# EAGLE board Companion bot (EAGLE 9.7.0)
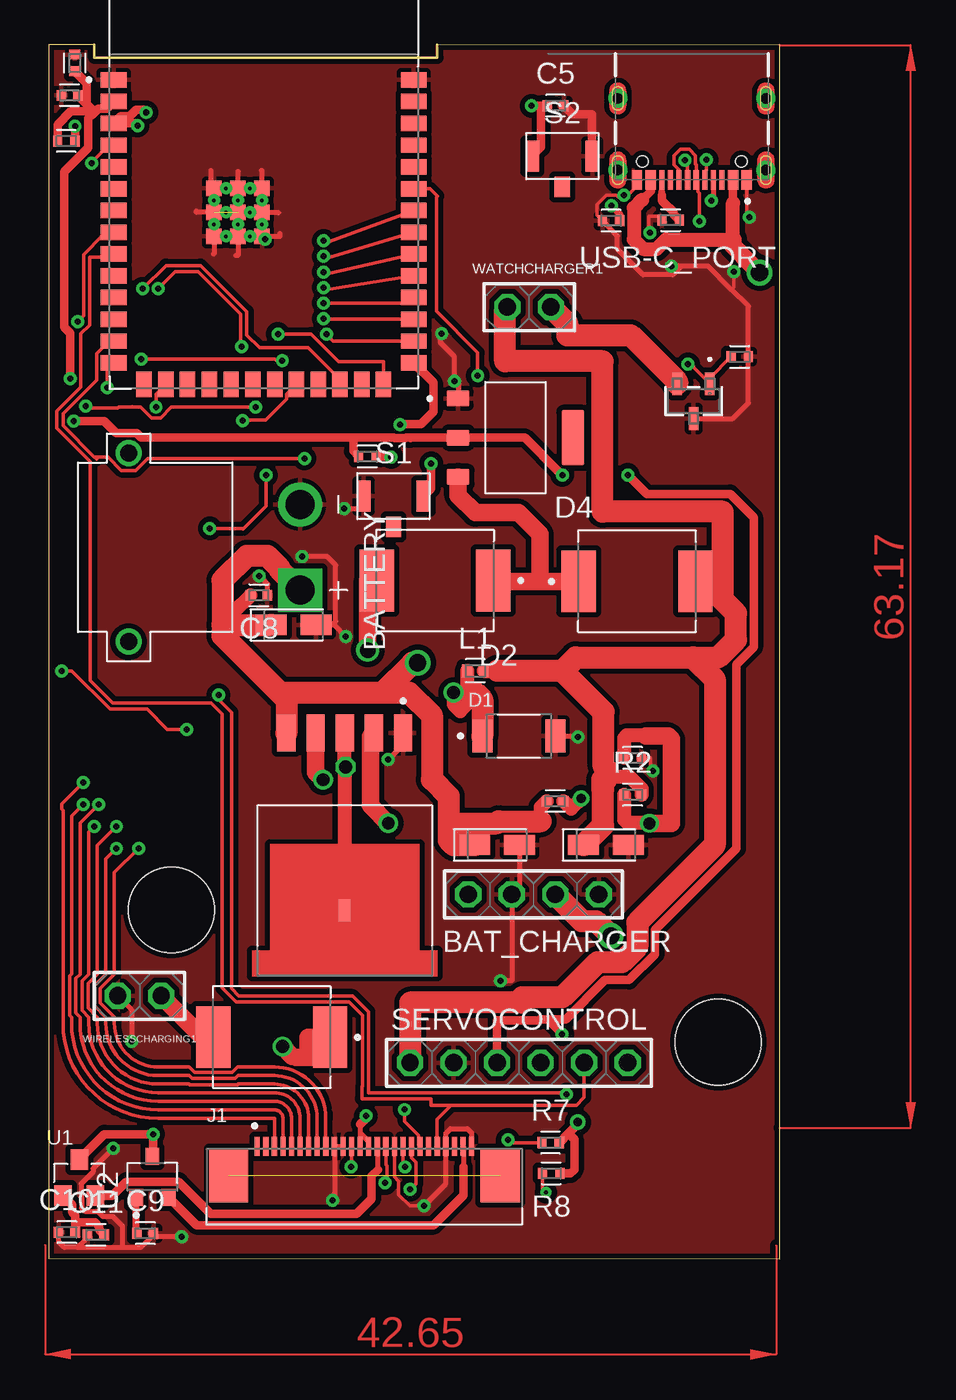
[diagram p0: board, top side]
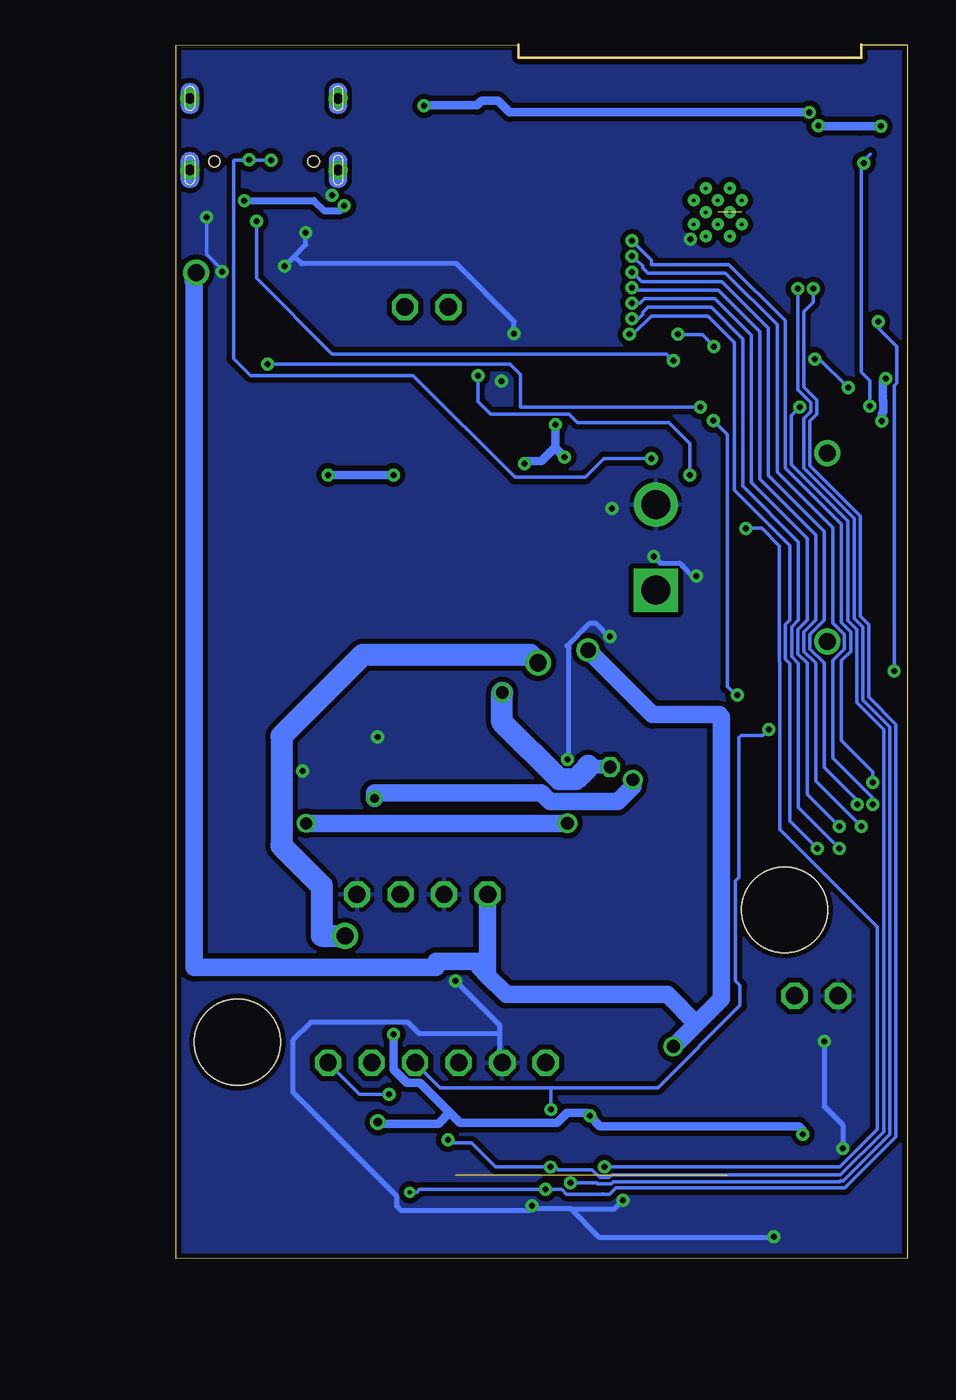
[diagram p1: board, bottom side, seen from below]

Size 42.65 x 70.82 mm. Coordinates in mm from the lower left corner, seen from the top.
Outline: 0,70.82 0,0.02 42.65,0 42.65,70.8 22.66,70.81 22.66,70.07 2.67,70.07 2.67,70.82 0,70.82
Copper layers (1*16): Top 0.035mm / dielectric 1.5mm / Bottom 0.035mm
Design rules "Fusion Electronics Design Rules": minimum track width 6mil, minimum drill 0.35mm, track to track 6mil, track to pad 6mil, pad to pad 6mil, via to via 6mil, smd to smd 6mil, copper to edge 6mil, drill to drill 6mil, minimum pad ring 10mil, minimum via ring 8mil, stop-mask expansion 4mil, vias tented up to drill 9999mil, thermal gap 10mil
Holes 5 mm at 39.07,12.64 7.16,20.35

## Footprints (pad centres in the part's own frame; a part is rotated, then mirrored left to right if it is on the bottom)
SOT229P700X180-4N = smd 1.31 x 0.93: 1 -3.345,2.29; 2 -3.345,0; 3 -3.345,-2.29 | smd 1.31 x 3.24: 4 3.345,0
CONV_XL4015 = smd 2.16 x 1.07: 1 -10.335,3.4; 2 -10.335,1.7; 3 -10.335,0; 4 -10.335,-1.7; 5 -10.335,-3.4 | smd 1.27 x 0.635: 3.1 0,0
1X04 = drill 1.016 octagon: 1 -3.81,0; 2 -1.27,0; 3 1.27,0; 4 3.81,0
AMASS_XT30PW-M = drill 1.7: N 2.5,-10 | drill 1.7 square: P -2.5,-10 | drill 1: S1 5.5,0; S2 -5.5,0
CAPC1005X60 = smd 0.56 x 0.629: 1 -0.485,0; 2 0.485,0
CAPMP3216X180N = smd 1.796 x 1.189: 1 -1.31,0; 2 1.31,0
SODFL4725X110N = smd 1.17 x 1.92: A 2.125,0; C -2.125,0
DIO_SS34 = smd 2 x 3.6: A 3.4,0; C -3.4,0
TE_2-1734592-6 = smd 0.3 x 1.1: 1 -6.25,0; 2 -5.75,0; 3 -5.25,0; 4 -4.75,0; 5 -4.25,0; 6 -3.75,0; 7 -3.25,0; 8 -2.75,0; 9 -2.25,0; 10 -1.75,0; 11 -1.25,0; 12 -0.75,0; 13 -0.25,0; 14 0.25,0; 15 0.75,0; 16 1.25,0; 17 1.75,0; 18 2.25,0; 19 2.75,0; 20 3.25,0; 21 3.75,0; 22 4.25,0; 23 4.75,0; 24 5.25,0; 25 5.75,0; 26 6.25,0 | smd 2.3 x 3.1: S1 -7.92,-1.7; S2 7.92,-1.7
INDC1006X60N = smd 0.56 x 0.729: 1 -0.485,0; 2 0.485,0
XCVR_ESP32S3WROOM1N8R8 = smd 1.5 x 0.9: 1 -8.75,5.26; 2 -8.75,3.99; 3 -8.75,2.72; 4 -8.75,1.45; 5 -8.75,0.18; 6 -8.75,-1.09; 7 -8.75,-2.36; 8 -8.75,-3.63; 9 -8.75,-4.9; 10 -8.75,-6.17; 11 -8.75,-7.44; 12 -8.75,-8.71; 13 -8.75,-9.98; 14 -8.75,-11.25; 27 8.75,-11.25; 28 8.75,-9.98; 29 8.75,-8.71; 30 8.75,-7.44; 31 8.75,-6.17; 32 8.75,-4.9; 33 8.75,-3.63; 34 8.75,-2.36; 35 8.75,-1.09; 36 8.75,0.18; 37 8.75,1.45; 38 8.75,2.72; 39 8.75,3.99; 40 8.75,5.26 | smd 0.9 x 1.5: 15 -6.985,-12.5; 16 -5.715,-12.5; 17 -4.445,-12.5; 18 -3.175,-12.5; 19 -1.905,-12.5; 20 -0.635,-12.5; 21 0.635,-12.5; 22 1.905,-12.5; 23 3.175,-12.5; 24 4.445,-12.5; 25 5.715,-12.5; 26 6.985,-12.5 | smd 0.9 x 0.9: 41_1 -1.5,-2.46; 41_2 -2.9,-2.46; 41_3 -0.1,-2.46; 41_4 -2.9,-3.86; 41_5 -1.5,-3.86; 41_6 -0.1,-3.86; 41_7 -2.9,-1.06; 41_8 -1.5,-1.06; 41_9 -0.1,-1.06 | drill 0.2 pad 0.4: 41_10 -1.5,-1.76; 41_11 -2.9,-1.76; 41_12 -0.1,-1.76; 41_13 -2.9,-3.16; 41_14 -1.5,-3.16; 41_15 -0.1,-3.16; 41_16 -2.2,-1.06; 41_17 -0.8,-1.06; 41_18 -2.2,-2.46; 41_19 -0.8,-2.46; 41_20 -2.2,-3.86; 41_21 -0.8,-3.86
RESC1005X40 = smd 0.535 x 0.644: 1 -0.507,0; 2 0.507,0
B3U-1100P(M) = smd 0.8 x 1.8: 1 1.75,0; 2 -1.75,0 | smd 0.9 x 1.2: 3 0,-1.8
1X06 = drill 1.016 octagon: 1 -6.35,0; 2 -3.81,0; 3 -1.27,0; 4 1.27,0; 5 3.81,0; 6 6.35,0
SOT-23 = smd 1.016 x 1.2: 1 -0.95,-1.06; 2 0.95,-1.06; 3 0,1.06
VREG_XC6206P282MR = smd 1 x 0.8: 1 -1.2,0.95; 2 -1.2,-0.95; 3 1.2,0
SOT_DS-T1-GE3_VIS = smd 0.559 x 1.321: 1 -0.95,-1.016; 2 0.95,-1.016; 3 0,1.016
GCT_USB4105GFA = smd 0.6 x 1.15: A1_B12 -3.2,4.755; A4_B9 -2.4,4.755; B1_A12 3.2,4.755; B4_A9 2.4,4.755 | smd 0.3 x 1.15: A5 -1.25,4.755; A6 -0.25,4.755; A7 0.25,4.755; A8 1.25,4.755; B5 1.75,4.755; B6 0.75,4.755; B7 -0.75,4.755; B8 -1.75,4.755 | drill 0.6 pad 1: SH1 -4.32,4.18; SH2 4.32,4.18; SH3 -4.32,0; SH4 4.32,0 | hole 0.65: 2.89,3.68; -2.89,3.68
1X02 = drill 1.016 octagon: 1 -1.27,0; 2 1.27,0

## Placement (x,y rotation side)
5V-3.3V_STEPDOWN  AMS1117-3.3  [SOT229P700X180-4N]  27.24,47.9 0 top
8V-5V_STEPDOWN  XL4015  [CONV_XL4015]  17.27,20.33 270 top
BAT_CHARGER  PINHD-1X4  [1X04]  28.29,21.25 0 top
BATTERY  XT30PW-M  [AMASS_XT30PW-M]  4.66,41.5 90 top
C1  1uF  [CAPC1005X60]  29.55,26.7 0 top
C2  220uF  [CAPMP3216X180N]  26.16,24.14 0 top
C3  220uF  [CAPMP3216X180N]  32.51,24.14 0 top
C4  0.1uF  [CAPC1005X60]  1.22,67.86 0 top
C5  0.1uF  [CAPC1005X60]  29.57,67.26 0 top
C6  10uF  [CAPC1005X60]  1.53,69.76 270 top
C7  [CAPMP3216X180N]  14.3,36.98 0 top
C8  0.1uF  [CAPC1005X60]  12.27,38.7 180 top
C9  10uF  [CAPC1005X60]  5.64,1.49 0 top
C10  10uF  [CAPC1005X60]  1.06,1.55 0 top
C11  0.1uF  [CAPC1005X60]  2.76,1.4 0 top
D1  SS54FSH  [SODFL4725X110N]  27.43,30.49 0 top
D2  SS34  [DIO_SS34]  22.54,39.56 180 top
D3  SS34  [DIO_SS34]  13.01,12.93 180 top
D4  SS34  [DIO_SS34]  34.33,39.52 0 top
J1  2-1734592-6  [TE_2-1734592-6]  18.42,6.55 0 top
L1  47uH  [INDC1006X60N]  24.89,34.3 0 top
PROCESSOR  ESP32-S3-WROOM-1-N8R8  [XCVR_ESP32S3WROOM1N8R8]  12.55,63.51 0 top
R1  5.1k  [RESC1005X40]  32.81,60.56 0 top
R2  3k  [RESC1005X40]  34.08,27.07 0 top
R3  1k  [RESC1005X40]  34.08,29.22 0 top
R4  5.1k  [RESC1005X40]  36.28,60.58 180 top
R5  10k  [RESC1005X40]  1.03,65.21 0 top
R6  10k  [RESC1005X40]  18.6,46.8 0 top
R7  1k  [RESC1005X40]  29.28,6.78 0 top
R8  4.7k  [RESC1005X40]  29.32,4.98 180 top
R26  10k  [RESC1005X40]  40.32,52.61 180 top
S1  B3U-X100B3U-1100P(M)1100P(M)  [B3U-1100P(M)]  20.12,44.49 0 top
S2  B3U-X100B3U-1100P(M)1100P(M)  [B3U-1100P(M)]  29.97,64.32 0 top
SERVOCONTROL  PINHD-1X6  [1X06]  27.43,11.44 0 top
U1  PMIC-XC6206P122MR(SOT23)  [SOT-23]  1.79,4.74 0 top
U2  XC6206P282MR  [VREG_XC6206P282MR]  6.05,4.79 90 top
U4  SI2300DS-T1-GE3SOT_DS-T1-GE3_VIS  [SOT_DS-T1-GE3_VIS]  37.63,50.03 180 top
USB-C_PORT  USB4105GFA  [GCT_USB4105GFA]  37.53,67.69 180 top
WATCHCHARGER1  PINHD-1X2  [1X02]  28.03,55.52 0 top
WIRELESSCHARGING1  PINHD-1X2  [1X02]  5.3,15.34 180 top

## Library data of the parts
5V-3.3V_STEPDOWN = AMS1117-3.3; AVAILABILITY: Not in stock; CHECK_PRICES: https://www.snapeda.com/parts/AMS1117-3.3/Advanced+Monolithic+Systems/view-part/?ref=eda; DESCRIPTION: Sot223/Pkg 1-Amp 3.3-Volt Low Drop Out Voltage Regulatator; MF: Advanced Monolithic Systems; MP: AMS1117-3.3; PACKAGE: SOT-223 Seeed Technology; PRICE: None; SNAPEDA_LINK: https://www.snapeda.com/parts/AMS1117-3.3/Advanced+Monolithic+Systems/view-part/?ref=snap
8V-5V_STEPDOWN = XL4015; AVAILABILITY: Not in stock; CHECK_PRICES: https://www.snapeda.com/parts/XL4015/XLSEMI/view-part/?ref=eda; DESCRIPTION: 5A 180KHz 36V Buck DC to DC Converter; MF: XLSEMI; MP: XL4015; PACKAGE: None; PRICE: None; SNAPEDA_LINK: https://www.snapeda.com/parts/XL4015/XLSEMI/view-part/?ref=snap
BAT_CHARGER = Connector; CATEGORY: Connectors; DESCRIPTION: Header-Straight-4 Position; PACKAGE_TYPE: Through Hole; PITCH: 0.100" (2.54mm); SUBCATEGORY: Headers; TYPE: Male Pins
BATTERY = XT30PW-M; AVAILABILITY: In Stock; CHECK_PRICES: https://www.snapeda.com/parts/XT30PW-M/AMASS/view-part/?ref=eda; DESCRIPTION: Socket; DC supply; XT30; male; PIN: 2; on PCBs; THT; Colour: yellow; MF: AMASS; MP: XT30PW-M; PACKAGE: None; PRICE: None; SNAPEDA_LINK: https://www.snapeda.com/parts/XT30PW-M/AMASS/view-part/?ref=snap
C1 C4-C6 C8-C11 = Capacitor; CATEGORY: Capacitor; PACKAGE_SIZE: 0402; PACKAGE_TYPE: Surface Mount; SUBCATEGORY: Ceramic Capacitors; TYPE: MLCC
C2 C3 C7 = Capacitor; CATEGORY: Capacitor; PACKAGE_SIZE: 1206; PACKAGE_TYPE: Surface Mount; SUBCATEGORY: Tantalum Capacitors; TYPE: Polymer Capacitors
D1 = SS54FSH; AVAILABILITY: In Stock; CHECK_PRICES: https://www.snapeda.com/parts/SS54FSH/taiwan/view-part/?ref=eda; DESCRIPTION: 5A, 40V, Automotive Planar Schottky; MF: Taiwan Semiconductor; MP: SS54FSH; PACKAGE: SOD-128-2 Taiwan Semiconductor; PRICE: None; SNAPEDA_LINK: https://www.snapeda.com/parts/SS54FSH/taiwan/view-part/?ref=snap
D2-D4 = SS34; AVAILABILITY: In Stock; CHECK_PRICES: https://www.snapeda.com/parts/SS34/taiwan/view-part/?ref=eda; DESCRIPTION: 3A, 40V, Planar Schottky; MF: Taiwan Semiconductor; MP: SS34; PACKAGE: DO-214AB-2 Taiwan Semiconductor; PRICE: None; PURCHASE-URL: https://www.snapeda.com/api/url_track_click_mouser/?unipart_id=4810221&manufacturer=Taiwan Semiconductor&part_name=SS34&search_term=ss34; SNAPEDA_LINK: https://www.snapeda.com/parts/SS34/taiwan/view-part/?ref=snap
J1 = 2-1734592-6; AVAILABILITY: In Stock; CHECK_PRICES: https://www.snapeda.com/parts/2-1734592-6/TE+Connectivity+AMP+Connectors/view-part/?ref=eda; COMMENT: 2-1734592-6; DESCRIPTION: 26 Position FPC Connector Contacts, Bottom 0.020 (0.50mm) Surface Mount, Right Angle; EU_ROHS_COMPLIANCE: Compliant; MF: TE Connectivity; MP: 2-1734592-6; PACKAGE: None; PRICE: None; SNAPEDA_LINK: https://www.snapeda.com/parts/2-1734592-6/TE+Connectivity+AMP+Connectors/view-part/?ref=snap
L1 = Inductor; CATEGORY: Inductors; DESCRIPTION: Chip 1.00 X 0.60 X 0.60 mm body 0402(1006-METRIC); PACKAGE_SIZE: 0402; PACKAGE_TYPE: Surface Mount
PROCESSOR = ESP32-S3-WROOM-1-N8R8; AVAILABILITY: In Stock; CHECK_PRICES: https://www.snapeda.com/parts/ESP32-S3-WROOM-1-N8R8/Espressif+Systems/view-part/?ref=eda; DESCRIPTION: Bluetooth, WiFi 802.11b/g/n, Bluetooth v5.0 Transceiver Module 2.4GHz PCB Trace Surface Mount; MF: Espressif Systems; MP: ESP32-S3-WROOM-1-N8R8; PACKAGE: NON STANDARD Espressif Systems; PRICE: None; PURCHASE-URL: https://www.snapeda.com/api/url_track_click_mouser/?unipart_id=8936581&manufacturer=Espressif Systems&part_name=ESP32-S3-WROOM-1-N8R8&search_term=esp32-s3-wroom-1; SNAPEDA_LINK: https://www.snapeda.com/parts/ESP32-S3-WROOM-1-N8R8/Espressif+Systems/view-part/?ref=snap
R1-R8 R26 = Resistor; CATEGORY: Resistors; DESCRIPTION: Chip Resistor 1.05 X 0.54 X 0.40 mm body 0402(1005-METRIC) Package; PACKAGE_SIZE: 0402; PACKAGE_TYPE: Surface Mount
S1 S2 = Switch; CATEGORY: Switches; DATASHEET: https://omronfs.omron.com/en_US/ecb/products/pdf/en-b3u.pdf; DESCRIPTION: Tactile Switch SPST-NO Top Actuated Surface Mount; MANUFACTURER: Omron Electronics Inc-EMC Div; MPN: B3U-1100PM; OPERATING_TEMPERATURE: -25°C ~ 70°C; PACKAGE_SIZE: NA; PACKAGE_TYPE: SMD; PART_STATUS: ACTIVE; ROHS: COMPLIANT; SERIES: B3U; SUBCATEGORY: Tactile Switches; TYPE: SPST-NO
SERVOCONTROL = Connector; CATEGORY: Connectors; DESCRIPTION: Header-Straight-6 Position; PACKAGE_TYPE: Through Hole; PITCH: 0.100" (2.54mm); SUBCATEGORY: Headers; TYPE: Male Pins
U1 = PMIC-XC6206P122MR_SOT23_; AVAILABILITY: In Stock; CHECK_PRICES: https://www.snapeda.com/parts/XC6206P122MR/Torex/view-part/?ref=eda; DESCRIPTION: Linear Voltage Regulator IC Positive Fixed 1 Output 60mA SOT-23; MF: Torex; MP: XC6206P122MR; PACKAGE: None; PRICE: None; SNAPEDA_LINK: https://www.snapeda.com/parts/XC6206P122MR/Torex/view-part/?ref=snap
U2 = XC6206P282MR; AVAILABILITY: In Stock; CHECK_PRICES: https://www.snapeda.com/parts/XC6206P282MR/Torex/view-part/?ref=eda; DESCRIPTION: Linear Voltage Regulator IC Positive Fixed 1 Output 150mA SOT-23; MF: Torex Semiconductor Ltd; MP: XC6206P282MR; PACKAGE: None; PRICE: None; SNAPEDA_LINK: https://www.snapeda.com/parts/XC6206P282MR/Torex/view-part/?ref=snap
U4 = 2026-03-09_07-57-06_Library; COPYRIGHT: Copyright (C) 2026 Ultra Librarian. All rights reserved.; DATASHEET: https://www.vishay.com/doc?65701; DESCRIPTION: N-CHANNEL 30-V (D-S) MOSFET; MANUFACTURER_NAME: Vishay; MANUFACTURER_PART_NUMBER: SI2300DS-T1-GE3
USB-C_PORT = USB4105GFA; AVAILABILITY: In Stock; CHECK_PRICES: https://www.snapeda.com/parts/USB4105GFA/Global+Connector+Technology/view-part/?ref=eda; DESCRIPTION: USB-C (USB TYPE-C) USB 2.0 Receptacle Connector 24 (16+8 Dummy) Position Surface Mount, Right Angle; Through Hole; MF: Global Connector Technology; MP: USB4105GFA; PACKAGE: None; PRICE: None; PURCHASE-URL: https://www.snapeda.com/api/url_track_click_mouser/?unipart_id=8191105&manufacturer=Global Connector Technology&part_name=USB4105GFA&search_term=usb4105; SNAPEDA_LINK: https://www.snapeda.com/parts/USB4105GFA/Global+Connector+Technology/view-part/?ref=snap
WATCHCHARGER1 WIRELESSCHARGING1 = Connector; CATEGORY: Connectors; DESCRIPTION: Header-Straight-2 Position; PACKAGE_TYPE: Through Hole; PITCH: 0.100" (2.54mm); SUBCATEGORY: Headers; TYPE: Male Pins

## Nets
1.2V: J1.15 U1.2
2.8V: J1.25 U2.2
3V3: 5V-3.3V_STEPDOWN.2 C4.2 C6.2 J1.13 J1.14 PROCESSOR.2 R5.1 R6.1 R7.2 R8.1 SERVOCONTROL.3 U1.3 U2.3
5V_PWR: C3.1 D4.A L1.2 R2.2 SERVOCONTROL.1 WATCHCHARGER1.1
BAT+: 8V-5V_STEPDOWN.5 BAT_CHARGER.3 BATTERY.P C1.1 C2.1 C7.1 C8.2
CAM_RX: PROCESSOR.36
CAM_TX: PROCESSOR.37
GND: 5V-3.3V_STEPDOWN.1 8V-5V_STEPDOWN.1 BAT_CHARGER.2 BAT_CHARGER.4 BATTERY.N C2.2 C3.2 C4.1 C5.2 C6.1 C7.2 C8.1 C9.2 C10.1 C11.1 D1.A J1.10 J1.11 J1.17 J1.23 J1.26 PROCESSOR.1 PROCESSOR.40 PROCESSOR.41_1 PROCESSOR.41_2 PROCESSOR.41_3 PROCESSOR.41_4 PROCESSOR.41_5 PROCESSOR.41_6 PROCESSOR.41_7 PROCESSOR.41_8 PROCESSOR.41_9 R1.1 R3.2 R4.2 R26.1 S1.2 S2.1 SERVOCONTROL.2 U4.3 USB-C_PORT.A1_B12 USB-C_PORT.B1_A12 USB-C_PORT.SH1 USB-C_PORT.SH2 USB-C_PORT.SH3 USB-C_PORT.SH4 WIRELESSCHARGING1.2
I08: PROCESSOR.12
I09: PROCESSOR.17
I014: PROCESSOR.22 SERVOCONTROL.6
I015: J1.20 PROCESSOR.8 SERVOCONTROL.4
I016: J1.22 PROCESSOR.9 SERVOCONTROL.5
I017: PROCESSOR.10
I018: PROCESSOR.11
IO4: PROCESSOR.4 R26.2 U4.1
IO35: J1.9 PROCESSOR.28
IO36: J1.8 PROCESSOR.29
IO37: J1.7 PROCESSOR.30
IO38: J1.6 PROCESSOR.31
IO39: J1.5 PROCESSOR.32
IO40: J1.4 PROCESSOR.33
IO41: J1.3 PROCESSOR.34
IO42: J1.12 PROCESSOR.35
IO45: J1.16 PROCESSOR.26
IO46: J1.18 PROCESSOR.16 R7.1
IO47: J1.19 PROCESSOR.24 R8.2
N$1: R1.2 USB-C_PORT.A5
N$2: R4.1 USB-C_PORT.B5
N$3: 8V-5V_STEPDOWN.4 C1.2
N$4: 8V-5V_STEPDOWN.3 8V-5V_STEPDOWN.3.1 D1.C L1.1
N$5: 8V-5V_STEPDOWN.2 R2.1 R3.1
N$6: C5.1 PROCESSOR.3 R5.2 S2.2
N$7: PROCESSOR.27 R6.2 S1.1
N$8: PROCESSOR.23
N$9: 5V-3.3V_STEPDOWN.3 D2.C D4.C
N$13: C9.1 U2.1
N$20: PROCESSOR.25
N$41: U4.2 WATCHCHARGER1.2
N$44: D3.A WIRELESSCHARGING1.1
N$50: J1.S1 J1.S2
USB_DN: PROCESSOR.13 USB-C_PORT.A7 USB-C_PORT.B7
USB_DP: PROCESSOR.14 USB-C_PORT.A6 USB-C_PORT.B6
VBUS: BAT_CHARGER.1 D2.A D3.C USB-C_PORT.A4_B9 USB-C_PORT.B4_A9
VSS: C10.2 C11.2 U1.1

## Tracks (layer width: path | path; a pad name or v marks a point on that pad's centre or on a via)
1.2V
  Top 0.305: J1.15 19.21,6.52 19.21,5.19
  Top 0.508: U1.2 3.72,3.68 4.54,4.49 7.59,4.49 9.46,2.62 17.96,2.62 18.85,3.51 18.85,4.84 19.21,5.19
2.8V
  Top 0.305: J1.25 24.2,6.52 24.2,5.35
  Top 0.508: 24.19,5.36 24.2,5.35 24.2,3.7 22.46,1.96 8.63,1.96 U2.2
3V3  (via drill 0.35, 0.5)
  Top 0.305: 18.17,7.36 18.17,7.85 18.16,7.86 | 18.17,7.36 J1.13 | 18.17,7.36 18.67,6.86 J1.14
  Top 0.508: 21.15,47.9 5V-3.3V_STEPDOWN.2 27.79,47.9 29.82,45.87 29.83,45.87 v29.97,45.73 | 21.15,47.9 21.12,47.86 | v1.47,48.86 3.24,48.86 3.94,48.16 5.14,48.16 5.41,47.9 17.78,47.9 | PROCESSOR.2 3.39,67.08 2.88,67.08 2.51,66.72 | 2.51,66.72 2.51,67.06 2.22,67.35 | 2.22,67.35 C4.2 | 2.22,67.35 2.22,68.59 C6.2 | 17.78,47.9 17.78,47.1 R6.1 | 2.51,66.72 2.32,66.52 2.32,64.83 0.91,63.41 0.91,54.35 1.24,54.01 v1.24,51.33 | 2.51,66.72 2.29,66.93 1.3,66.93 0.52,66.16 R5.1 | v33.78,45.73 34.9,44.62 39.76,44.62 41.14,43.24 41.14,35.67 40.13,34.67 40.13,23.94 35.38,19.18 35.38,17.77 33.87,16.26 32.45,16.26 30.18,13.98 29.13,13.98 | R6.1 | 29.13,13.98 29.96,13.15 v29.96,13.1 | v18.51,8.33 18.51,8.19 18.17,7.85 | U2.3 6.09,6.02 v6.09,7.27 3.25,7.27 U1.3 | v30.87,7.97 30.87,7.86 30.32,7.31 | 30.32,7.31 R7.2 | 30.32,7.31 30.67,6.96 30.67,5.2 30.45,4.98 R8.1 | 29.13,13.98 28.66,13.98 28.66,13.91 26.16,13.91 SERVOCONTROL.3 | 21.15,47.9 20.86,47.9 20.83,47.87 20.18,47.87 20.15,47.9 17.78,47.9
  Bottom 0.508: v1.47,48.86 1.47,49.32 1.38,49.4 1.38,50.05 1.41,50.08 1.41,51.17 v1.24,51.33 | v29.97,45.73 v33.78,45.73 | v29.96,13.1 29.96,11.04 29.19,10.27 28.43,10.27 26.69,8.53 | v6.09,7.27 6.09,7.49 6.33,7.74 17.91,7.74 v18.51,8.33 18.68,8.5 19.86,8.5 20.44,7.92 26.07,7.92 26.69,8.53 | 26.69,8.53 27.35,7.88 30.78,7.88 v30.87,7.97
5V_PWR
  Top 0.813: L1.2 26.16,34.3 | 32.3,27.95 32.51,27.95 | 32.51,28.14 33.88,28.14 34.58,27.43 R2.2
  Top 1.27: 29.97,34.3 27.84,34.3 26.16,34.3 | 29.97,34.3 30.75,35.08 37.59,35.08 | 37.59,35.08 39.07,35.08 40.1,36.1 40.1,37.67 39.33,38.43 | 39.33,38.43 38.86,38.9 | 38.86,38.9 38.3,38.9 | 32.51,27.95 32.51,28.14 32.51,28.59 32.38,28.72 32.38,31.9 29.97,34.3 | 39.33,38.43 39.33,43.58 32.31,43.58 32.31,52.36 26.62,52.36 26.62,55.38 WATCHCHARGER1.1 | 32.3,27.95 32.3,27.42 32.34,27.38 32.34,25.27 C3.1 | 37.59,35.08 38.86,33.81 38.86,24.14 34.34,19.61 34.34,18.2 33.44,17.3 32.02,17.3 29.97,15.25 27.62,15.25 27.62,14.95 21.08,14.95 SERVOCONTROL.1 | 38.86,38.9 38.86,39.52 D4.A
BAT+  (via drill 1)
  Top 0.813: C1.1 28.7,26.33 28.7,25.52 | C8.2 10.79,37.71 10.79,36.98
  Top 1.27: 13.46,33.03 13.87,32.62 8V-5V_STEPDOWN.5 | 13.46,33.03 19.49,33.03 | 23.33,25.41 23.33,26.97 22.35,27.95 22.35,31.71 21.04,33.03 19.49,33.03 | 23.33,25.41 23.33,24.43 23.62,24.14 C2.1 | 23.33,25.41 26.14,25.41 26.25,25.52 28.7,25.52 | 19.49,33.03 21.22,34.77 v21.53,34.77 | v32.8,18.83 31.93,19.71 31.11,19.71 BAT_CHARGER.3 | 10.15,36.98 10.15,36.34 13.46,33.03 | 10.15,36.98 10.79,36.98 C7.1 | 10.15,36.98 10.15,39.58 11.57,41 12.77,41 13.45,40.32 13.45,40.21 BATTERY.P
  Bottom 1.27: v21.53,34.77 22,35.23 31.76,35.23 36.5,30.49 36.5,24.09 34.16,21.75 34.16,18.85 34.15,18.83 v32.8,18.83
GND  (via drill 0.35)  (1 unrouted)
  Top 0.203: R3.2 35.11,29.22 35.11,28.46 v35.26,28.46 | J1.17 20.17,4.79 20.43,4.53 20.43,3.74 21.07,3.09 v21.89,3.09 | R4.2 35.53,60.83 35.02,60.83 35.02,60.82 35.02,59.91 v35.08,59.85 | USB-C_PORT.B1_A12 34.33,62.56 33.68,61.91 | R1.1 31.99,60.87 31.99,61.5 32.54,62.05 33.1,62.05 33.24,61.91 33.68,61.91 | USB-C_PORT.A1_B12 40.73,60.92 v40.88,60.76 | v39.97,57.57 39.97,56.67 39.84,56.55 | 33.68,61.91 v33.56,62.03
  Top 0.305: D1.A 30.77,30.49 30.77,30.45 v30.89,30.45 | S1.2 18.37,43.74 17.23,43.74 v17.23,43.77 | 5V-3.3V_STEPDOWN.1 23.93,50.22 23.93,51.21 23.67,51.21 v23.67,51.19 23.67,52.64 22.86,53.44 22.86,53.88 v22.94,53.95 | PROCESSOR.41_7 9.48,62.45 9.48,63.5 | PROCESSOR.41_8 11.05,63.42 11.06,63.42 | PROCESSOR.41_9 12.45,63.47 12.41,63.47 | PROCESSOR.41_3 13.4,61.05 13.4,61.01 | PROCESSOR.41_6 13.5,59.65 13.5,59.82 | PROCESSOR.41_5 11.05,58.53 10.93,58.53 | PROCESSOR.41_4 9.65,58.6 9.62,58.6 | PROCESSOR.41_2 8.61,61.05 8.61,61.12 | C2.2 27.47,21.25 BAT_CHARGER.2 27.02,16.22 v26.35,16.22 | v21.89,3.09 23.17,4.37 J1.23 23.17,7.32 23.44,7.59 24.43,7.59 24.67,7.35 J1.26 | C11.1 2.13,1.26 2.13,1.11 1.68,0.66 | 1.68,0.66 0.92,0.66 0.58,1 C10.1 | 1.68,0.66 4.29,0.66 | 4.29,0.66 5.37,0.66 6.12,1.41 C9.2 6.33,1.28 v7.77,1.28 | WIRELESSCHARGING1.2 4.84,14.53 v4.84,12.69 | 4.29,0.66 4.29,1.92 3.75,2.47 3.16,2.47 2.86,2.77 2.1,2.77 1.92,2.95 1.92,3.58 1.9,3.61 1.9,4.38 2.41,4.89 2.42,4.89 2.6,5.07 2.6,5.26 v3.77,6.43 | v16.57,3.4 16.67,3.5 J1.10 J1.11 | C7.2 16.55,36.98 16.7,37.13 | 16.7,37.13 16.75,37.18 16.75,40.46 16.24,40.97 v14.79,40.97 | v12.29,39.84 12.75,39.38 C8.1 | 8V-5V_STEPDOWN.1 20.67,29.96 19.92,29.2 19.89,29.2 v19.81,29.13 | v17.34,36.3 16.7,36.94 16.7,37.13 | U4.3 39.92,49.01 40.83,49.93 R26.1 40.83,55.55 40.83,55.56 | 40.83,55.56 | 40.83,55.56 39.84,56.55 38.49,57.9 36.92,57.9 | 36.92,57.9 v36.33,57.9 | 36.92,57.9 36.42,57.4 34.68,57.4 33.19,58.88 33.19,59.67 32.75,60.11 32.75,60.12 R1.1
  Top 0.508: C5.2 30.55,66.76 31.7,66.76 31.7,64.34 S2.1
  Bottom 0.203: v40.88,60.76 40.88,58.61 39.97,57.7 v39.97,57.57
  Bottom 0.305: v26.35,16.22 23.79,13.66 23.79,13.13 | 23.79,13.13 23.79,11.6 SERVOCONTROL.2 | 23.79,13.13 28.46,13.13 29.13,13.8 34.78,13.8 35.85,12.73 35.85,9.72 29.8,3.68 29.8,3.08 29.56,2.84 21.96,2.84 21.89,2.91 | 21.89,2.91 v21.89,3.09 | v4.84,12.69 4.84,8.88 3.77,7.81 v3.77,6.43 | v16.57,3.4 17.07,2.91 19.62,2.91 | 19.62,2.91 21.89,2.91 | 19.62,2.91 17.98,1.26 7.79,1.26 v7.77,1.28 | v14.79,40.97 14.4,40.58 13.26,40.58 13.08,40.4 13.08,40.38 12.55,39.84 v12.29,39.84 | v19.81,29.13 19.72,29.21 19.72,35.61 19.86,35.75 | 19.86,35.75 | 19.86,35.75 18.56,37.05 18.14,37.05 17.37,36.27 v17.34,36.3 | v36.33,57.9 35.76,58.47 | v22.94,53.95 22.94,54.68 26.3,58.04 35.33,58.04 35.76,58.47 | 35.76,58.47 35.08,59.15 v35.08,59.85
  other vias: 12.64,59.46
  pour Top (isolate 0.305): -12.34,-8.41 53.48,-8.41 53.48,81.28 -10.33,81.28
  pour Bottom (isolate 0.305): -10.15,-10.97 52.65,-10.97 52.65,80 -10.33,80 -10.15,-10.48 -10.15,-10.48 -10.15,-10.5 -10.15,-10.51 -10.15,-10.51
I014  (via drill 0.35)
  Top 0.203: PROCESSOR.22 13.89,50.44 13.89,50.15 12.67,48.93 11.36,48.93 v11.31,48.88 | v9.91,32.89 9.91,32.62 10.66,31.87 10.66,15.77 11.1,15.33 17.74,15.33 18.66,14.42 18.66,9.69 | v30.22,9.59 30.12,9.69 18.66,9.69 | 18.66,9.69 18.65,9.69
  Bottom 0.203: v11.31,48.88 10.49,48.06 10.49,33.38 10,32.89 v9.91,32.89 | v30.22,9.59 31.94,9.59 SERVOCONTROL.6
I015  (via drill 0.35)
  Top 0.203: PROCESSOR.8 3.62,59.7 3.16,59.7 2.03,58.58 2.03,55.01 v1.69,54.67 | J1.20 21.57,6.65 21.57,7.21 20.77,8.02 v20.77,8.7 | v0.76,34.3 1.35,34.3 3.59,32.06 5.75,32.06 6.92,30.89 v8.06,30.89
  Bottom 0.203: 20.78,9.98 14.55,9.98 9.75,14.78 9.75,15.94 10.01,16.2 10.01,22.05 9.81,22.25 9.81,30.39 9.67,30.54 8.41,30.54 v8.06,30.89 | 20.78,9.98 27.25,9.98 SERVOCONTROL.4 | v0.76,34.3 0.76,50.92 0.61,51.07 0.61,53.2 1.69,54.28 v1.69,54.67 | v20.77,8.7 20.77,9.97 20.78,9.98
I016
  Top 0.203: PROCESSOR.9 3.62,58.43 2.39,58.43 2.39,54.48 1.88,53.96 1.88,50.84 0.48,49.44 0.48,48.45 2.42,46.51 2.42,35.37 | 2.42,35.37 2.43,35.36 | SERVOCONTROL.5 31.24,9.4 30.8,8.96 23.48,8.96 | J1.22 22.67,8.15 23.48,8.96 | 23.48,8.96 22.32,8.96 22.32,9.34 18.29,9.34 | 2.42,35.37 2.42,33.73 3.74,32.41 9.49,32.41 10.13,31.78 10.13,15.8 10.95,14.98 17.52,14.98 18.3,14.2 18.3,10.05 18.29,10.05 18.29,9.34 | 18.29,9.34 18.28,9.34
IO4  (via drill 0.35)
  Top 0.203: v37.3,52.19 37.41,52.07 37.62,52.07 37.62,52.01 U4.1 38.58,51.38 R26.2 | v2.17,49.73 2.26,49.63 4.04,49.63 4.08,49.67 4.9,49.67 | PROCESSOR.4 3.67,64.83 3.38,64.83 2.52,63.97 v2.52,63.91 | 4.9,49.67 4.87,49.7 | v12.07,49.67 7.15,49.67 6.52,49.05 6,49.05 5.37,49.67 4.9,49.67
  Bottom 0.203: v37.3,52.19 23.17,52.19 22.56,51.58 22.56,49.69 22.55,49.67 v12.07,49.67 | v2.17,49.73 2.17,51.21 2.67,51.71 2.67,63.93 2.52,64.08 | v2.52,63.91 2.52,64.08 | 2.52,64.08 2.16,64.44
IO35  (via drill 0.35)
  Top 0.203: J1.9 16.17,8.19 arc90 13.17,11.19 11.04,11.19 10.72,10.87 8.51,10.87 8.19,11.19 6.38,11.19 arc-90 3.84,13.73 3.84,14.1 3.01,14.92 3.01,15.77 3.84,16.59 3.84,22.53 v5.24,23.93 | PROCESSOR.28 16.61,53.53 v16.2,53.93
  Bottom 0.203: v5.24,23.93 6.84,25.53 6.84,34.74 7.09,34.99 7.09,37.01 6.84,37.26 6.84,41.61 10.09,44.85 10.09,53.45 11.64,55 14.92,55 15.99,53.93 v16.2,53.93
IO36  (via drill 0.35)
  Top 0.203: J1.8 15.67,8.19 arc90 13.17,10.69 11.04,10.69 10.87,10.52 8.36,10.52 8.19,10.69 6.38,10.69 arc-90 3.34,13.73 3.34,14.09 2.66,14.78 2.66,15.91 3.34,16.59 3.34,23.31 v3.95,23.93 | PROCESSOR.29 16.09,54.8 v16.05,54.84
  Bottom 0.203: v3.95,23.93 6.34,26.31 6.34,34.74 6.74,35.14 6.74,36.86 6.34,37.26 6.34,41.81 9.59,45.06 9.59,53.66 11.43,55.5 15.12,55.5 15.42,55.21 15.42,55.11 15.69,54.84 v16.05,54.84
IO37  (via drill 0.35)
  Top 0.203: J1.7 15.17,8.19 arc90 13.17,10.19 11.04,10.19 11.01,10.16 8.21,10.16 8.18,10.19 6.38,10.19 arc-90 2.84,13.73 2.84,14.09 2.3,14.63 2.3,16.06 2.84,16.6 2.84,24.1 v3.95,25.22 | PROCESSOR.30 20.98,55.75 v16.05,55.75
  Bottom 0.203: v3.95,25.22 5.84,27.1 5.84,34.74 6.38,35.29 6.38,36.71 5.84,37.26 5.84,42.02 9.09,45.27 9.09,53.86 11.22,56 15.33,56 15.58,55.75 v16.05,55.75
IO38  (via drill 0.35)
  Top 0.203: J1.6 14.67,8.19 arc90 13.17,9.69 6.38,9.69 arc-90 2.34,13.73 2.34,14.09 1.94,14.48 1.94,16.21 2.34,16.6 2.34,24.88 v2.67,25.22 | PROCESSOR.31 16.05,56.5 v16.05,56.66
  Bottom 0.203: v2.67,25.22 5.34,27.88 5.34,34.74 6.03,35.44 6.03,36.57 5.34,37.26 5.34,42.23 8.59,45.48 8.59,54.07 11.02,56.5 15.89,56.5 v16.05,56.66
IO39  (via drill 0.35)
  Top 0.203: J1.5 14.17,8.19 arc90 13.17,9.19 6.38,9.19 arc-90 1.84,13.73 1.84,14.09 1.59,14.33 1.59,16.35 1.84,16.6 1.84,25.42 v2.92,26.5 | PROCESSOR.32 16.05,57.41 v16.05,57.57
  Bottom 0.203: v2.92,26.5 2.92,26.75 4.84,28.67 4.84,34.75 5.67,35.58 5.67,36.42 4.84,37.25 4.84,42.43 8.09,45.68 8.09,54.28 10.81,57 15.48,57 v16.05,57.57
IO40  (via drill 0.35)
  Top 0.203: J1.4 13.67,8.19 arc90 13.17,8.69 6.38,8.69 arc-90 1.34,13.73 1.34,14.08 1.23,14.19 1.23,16.5 1.34,16.61 1.34,25.83 v2.01,26.5 | PROCESSOR.33 16.05,58.32 v16.05,58.48
  Bottom 0.203: v2.01,26.5 2.01,26.89 4.34,29.22 4.34,34.9 3.66,35.58 3.66,36.42 4.34,37.1 4.34,42.64 7.59,45.89 7.59,54.49 10.6,57.5 15.12,57.5 15.42,57.79 15.42,57.89 15.85,58.32 15.89,58.32 v16.05,58.48
IO41  (via drill 0.35)
  Top 0.203: J1.3 13.17,8.19 6.38,8.19 arc-90 0.84,13.73 0.84,26.16 0.75,26.24 0.75,26.53 v2.01,27.79 | PROCESSOR.34 16.05,59.23 v16.05,59.38
  Bottom 0.203: v2.01,27.79 2.01,28.41 3.84,30.24 3.84,34.9 3.3,35.44 3.3,36.57 3.84,37.1 3.84,42.85 7.11,46.12 7.11,54.72 10.39,58 14.92,58 14.92,58.25 v16.05,59.38
IO42  (via drill 0.35)
  Top 0.203: J1.12 17.67,5.69 17.66,5.67 v17.66,5.37 v17.65,5.37 | v9.4,42.6 11.32,42.6 11.35,42.58 12.68,43.91 v12.68,45.71 | v25.03,51.52 25.03,52.86 22.63,55.27 22.63,61.93 22.68,61.99 22.25,62.42 PROCESSOR.35
  Bottom 0.203: v17.65,5.37 3.93,5.37 1.75,7.55 1.75,19.37 7.43,25.04 7.43,34.82 7.45,34.85 7.45,41.57 8.49,42.61 v9.4,42.61 v9.4,42.6 | v12.68,45.71 12.68,47.55 13.91,48.78 19.24,48.78 19.74,49.28 24.32,49.28 25.03,50 v25.03,51.52
IO45  (via drill 0.35)
  Top 0.203: J1.16 19.67,5.49 19.75,5.41 19.75,4.53 v19.64,4.42 | v6.39,56.58 7.39,57.58 8.71,57.58 11.19,55.1 11.19,53.29 v11.27,53.22 | v13.38,53.94 15.3,53.94 16.92,52.32 19.54,52.32 PROCESSOR.26
  Bottom 0.203: v11.27,53.22 11.95,53.9 13.33,53.9 v13.38,53.94 | v6.39,56.58 6.39,50.7 5.63,49.94 5.63,49.42 6.03,49.01 6.03,46.11 3.09,43.17 3.09,37.36 2.59,36.86 2.59,32.6 1.01,31.02 1.01,7.27 3.74,4.54 3.89,4.54 3.94,4.49 17.14,4.49 17.24,4.39 18.06,4.39 18.1,4.42 v19.64,4.42
IO46  (via drill 0.35)
  Top 0.203: J1.18 20.67,5.48 v20.8,5.35 | v6.26,49.68 6.26,50.14 6.27,50.15 6.27,50.44 PROCESSOR.16 | v26.79,6.93 26.95,6.78 R7.1
  Bottom 0.203: 20.52,5.35 20.37,5.2 18.38,5.2 17.92,4.74 17.39,4.74 17.23,4.91 3.89,4.91 1.37,7.42 1.37,30.87 2.94,32.44 2.94,36.71 3.45,37.22 3.45,43.02 6.75,46.32 6.75,49.18 v6.26,49.68 | 20.52,5.35 24.02,5.35 25.43,6.76 26.62,6.76 v26.79,6.93 | v20.8,5.35 20.52,5.35
IO47  (via drill 0.25, 0.35)
  Top 0.203: v5.48,56.58 6.85,57.94 8.86,57.94 11.55,55.25 11.55,53.89 12.3,53.15 15.15,53.15 17,51.3 PROCESSOR.24 | v29.01,3.88 28.82,4.08 R8.2 | J1.19 21.17,5.88 21.44,5.61 21.44,4.39 v21.09,4.04
  Bottom 0.203: 17.81,3.77 19.88,3.77 20.15,4.04 v21.09,4.04 28.44,4.04 28.6,3.88 v29.01,3.88 | 17.81,3.77 17.79,3.79 | v5.48,56.58 5.48,55.79 6.03,55.25 6.03,50.84 5.27,50.09 5.27,49.27 5.67,48.87 5.67,46.27 2.73,43.32 2.73,37.5 2.23,37.01 2.23,32.76 0.65,31.18 0.65,7.12 3.63,4.14 16.99,4.14 17.36,3.77 17.81,3.77
N$1  (via drill 0.35)
  Top 0.305: USB-C_PORT.A5 38.78,61.79
  Top 0.406: v38.67,61.74 38.73,61.74 38.78,61.79 | R1.2 33.32,60.94 v32.84,61.42
  Bottom 0.406: v38.67,61.74 | v38.67,61.74 34.61,61.74 34.01,61.13 33.1,61.13 32.84,61.38 v32.84,61.42
N$2
  Top 0.305: 35.78,62.23 USB-C_PORT.B5
  Top 0.406: 35.78,62.04 35.78,62.23
  Top 0.508: 35.78,62.04 35.78,61.73 36.2,61.31 36.21,61.31 36.45,61.07 36.45,60.92 R4.1
N$3  (via drill 0.55, 0.75)
  Top 0.813: C1.2 30.48,26.25 v31.07,26.85
  Top 1.016: 8V-5V_STEPDOWN.4 15.57,28.38 v16,27.95
  Bottom 1.016: v16,27.95 16,27.54 16.88,26.67 20.83,26.67 21.33,27.17 31.07,27.17 v31.07,26.85
N$4  (via drill 0.75)
  Top 0.813: L1.1 24.41,33.03 v23.62,33.03 23.62,32.33 24.01,31.95 24.89,32.84 24.89,33.03 | 17.27,28.69 8V-5V_STEPDOWN.3 | 17.27,28.69 v17.32,28.69 | 17.27,28.69 17.27,22.69 17.21,22.69 17.21,20.33 8V-5V_STEPDOWN.3.1
  Top 1.27: 24.89,33.03 25.31,32.61 D1.C
  Bottom 0.813: v17.32,28.69 18.54,28.69 18.61,28.76
  Bottom 1.27: 18.61,28.76 18.64,28.73 18.64,28.64 19.33,27.96 20.29,27.96 23.62,31.29 v23.62,33.03
N$5  (via drill 0.7, 0.75)
  Top 0.813: v35.05,25.41 35.01,25.45 33.73,25.45 33.57,25.62 R2.1 | 34.84,30.49 34.79,30.53 33.73,30.53 33.57,30.37 R3.1
  Top 1.016: v35.05,25.41 36.32,25.41 36.32,30.31 36.15,30.49 34.84,30.49 | v19.81,25.41 18.77,26.45 18.77,30.46 8V-5V_STEPDOWN.2
  Bottom 1.016: v19.81,25.41 v35.05,25.41
N$6  (via drill 0.35)
  Top 0.508: v5.19,66.09 5.06,66.23 PROCESSOR.3 4.21,66.64 4.72,66.64 5.1,67.03 5.54,67.03 v5.7,66.87 | v28.18,67.25 28.73,67.25 | 28.73,67.25 C5.1 | 28.73,67.25 28.73,64.84 S2.2 | v1.54,66.06 | v1.54,66.06 R5.2
  Bottom 0.508: v1.54,66.06 2.71,66.06 5.16,66.06 v5.19,66.09 | v5.7,66.87 23.19,66.87 23.86,67.54 24.83,67.54 25.09,67.29 28.14,67.29 v28.18,67.25
N$7  (via drill 0.35)
  Top 0.508: R6.2 19.95,46.8 v19.98,46.77 | 20.51,48.69 21.73,48.69 22.45,49.41 22.45,51.11 PROCESSOR.27 | v22.32,46.4 22.32,44.94 S1.1 | 20.51,48.69 | 20.51,48.69 v20.51,48.65
  Bottom 0.508: 20.54,47.33 v19.98,46.77 | 20.54,47.33 21.34,46.53 22.18,46.53 v22.32,46.4 | 20.54,47.33 20.51,47.37 v20.51,48.65
N$9
  Top 1.016: D4.C 28.66,39.52 | 28.66,39.52 25.99,39.52 D2.C | 28.66,39.52 28.66,42.28 27.41,43.52 24.89,43.52 23.89,44.52 5V-3.3V_STEPDOWN.3
N$13
  Top 0.406: U2.1 5.1,1.54 C9.1
N$41
  Top 1.27: WATCHCHARGER1.2 30.26,54.56 30.26,53.88 33.96,53.88 36.68,51.16 U4.2
N$44
  Top 1.016: D3.A 8.99,12.93 WIRELESSCHARGING1.1
N$50  (1 unrouted)
USB_DN  (via drill 0.35)
  Top 0.203: PROCESSOR.13 3.51,53.53 2.8,52.81 2.8,51.25 0.84,49.29 0.84,48.6 2.66,46.78 | 2.8,46.64 2.66,46.78 | USB-C_PORT.A7 37.28,63.92 v37.11,64.09 | v38.38,64.1 38.38,63.62 38.37,63.61 38.37,63.53 38.28,63.44 USB-C_PORT.B7 | 2.66,46.78 3.46,46.78 4.25,45.99 5.08,45.99 5.77,46.68 v14.93,46.68
  Bottom 0.203: 38.35,64.08 38.19,64.08 38.18,64.09 v37.11,64.09 | 38.35,64.08 v38.38,64.1 | v14.93,46.68 17.68,46.68 18.77,45.59 22.89,45.59 28.83,51.53 38.31,51.53 39.3,52.52 39.3,64.03 39.25,64.08 38.35,64.08
USB_DP  (via drill 0.35)
  Top 0.203: v3.43,50.81 3.43,51.89 PROCESSOR.14 | USB-C_PORT.B6 36.78,63.53 36.48,63.83 36.48,64.35 36.85,64.72 37.37,64.72 37.74,64.35 37.74,63.84 37.78,63.81 USB-C_PORT.A6 37.87,62.84 37.87,62.25 37.96,62.17 v37.96,60.52 | v13.63,52.38 13.3,52.38 13.19,52.49 v5.4,52.49
  Bottom 0.203: v3.43,50.81 5.11,52.49 v5.4,52.49 | v37.96,60.52 37.96,57.2 33.54,52.78 14.04,52.78 v13.63,52.38 | v37.96,60.52
VBUS  (via drill 0.75, 0.9, 1)
  Top 0.508: 39.93,61.6 USB-C_PORT.A4_B9 | USB-C_PORT.B4_A9 35.13,62.27 34.63,61.77
  Top 0.813: 39.93,61.6 39.92,61.6 39.92,59.46 36.02,59.46 35.47,58.91 34.69,58.91 34.14,59.46 34.14,61.29 34.63,61.77
  Top 1.016: 15.9,11.74 15.13,11.74 | 15.13,11.74 15.13,12.93 D3.C | v18.61,35.51 18.61,39.56 D2.A | 15.13,11.74 14.43,11.74 14.22,11.81 v13.65,12.38 | v41.48,57.53 41.01,58 39.92,59.09 39.92,59.46
  Bottom 1.016: v18.61,35.51 14.85,31.74 10.96,31.74 10.83,31.62 10.83,15.17 12.28,13.71 | 12.28,13.71 13.62,12.38 v13.65,12.38 | 12.28,13.71 13.98,15.41 23.38,15.41 24.48,16.51 | 24.48,16.51 BAT_CHARGER.1 | 24.48,16.51 24.95,16.99 24.95,17.36 27.49,17.36 27.49,16.99 41.6,16.99 41.6,57.02 41.65,57.06 41.65,57.36 v41.48,57.53
VSS
  Top 0.508: 1.55,2.07 C10.2 | 1.55,2.07 1.59,2.07 1.63,2.12 2.72,2.12 2.96,1.88 2.96,1.68 C11.2 | U1.1 1.36,3.15 1.36,2.72 1.55,2.54 1.55,2.07
(copper drawn outside any net)
  shapes: Top area x2